# Altium PCB PCB1.PcbDoc
Units mil, origin at the board's own origin, x right, y up, seen from the top; angles counter-clockwise.
Board outline 1181.1 x 2952.76 mil, 2 copper layers (Top Layer, Bottom Layer); 71 components, 40 nets, 303 pads, 0 vias.
Unrouted connection lines stored in the file: 171.
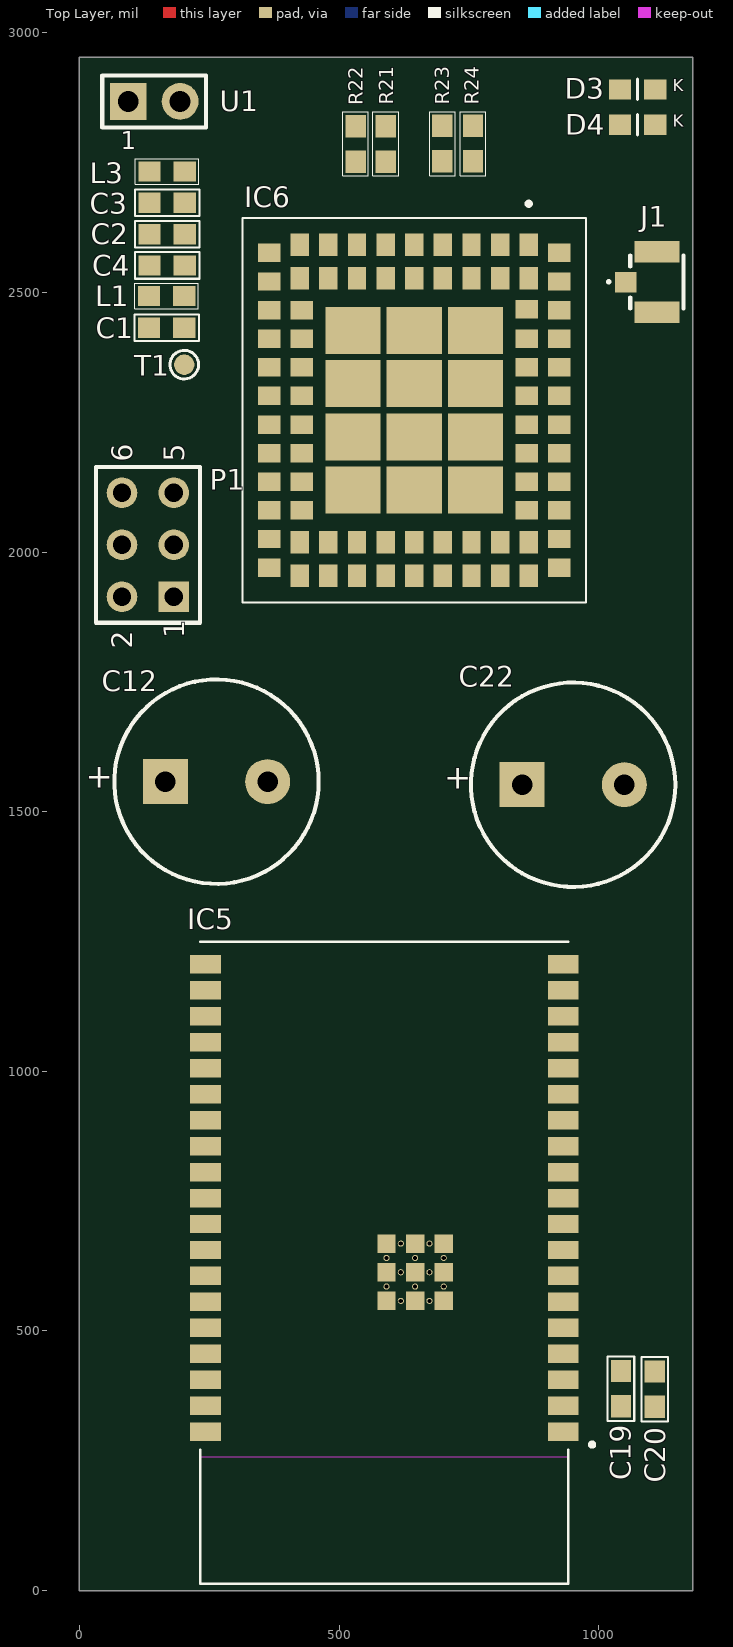
[diagram p0: Top Layer view]
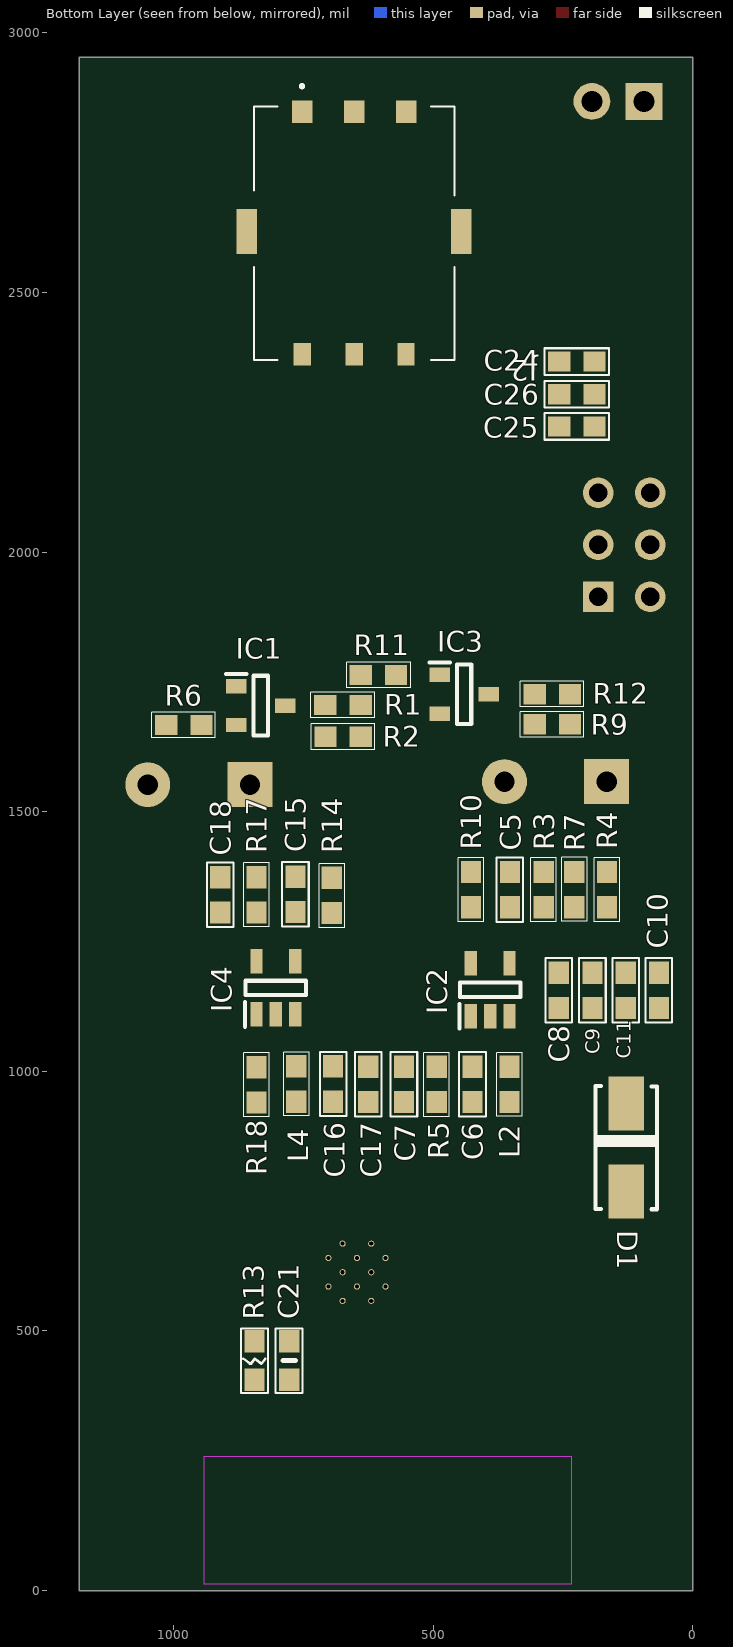
[diagram p1: Bottom Layer view, seen from below]

## Layer stack, top to bottom
Top Solder: solder mask 0.4, Solder Resist, Dk 3.5
Top Layer: signal copper 1.4
Dielectric 1: dielectric 12.6, FR-4, Dk 4.8
Bottom Layer: signal copper 1.4
Bottom Solder: solder mask 0.4, Solder Resist, Dk 3.5

## Board outline
0,0 0,2952.76 1181.1,2952.76 1181.1,0

## Design rules (kind name [scope] priority, off if disabled: settings)
Clearance [All] p1: gap=10 ignorepadtopadclearanceinfootprint=FALSE except(0: Arc-Hole Track-Hole SMDPad-Hole THPad-Hole Via-Hole Fill-Hole Poly-Hole Region-Hole Text-Hole)
PolygonConnect [All] p1: connectstyle=Relief reliefconductorwidth=10 reliefentries=4 polygonreliefangle="90 Angle" airgapwidth=10
RoutingVias [All] p1: holewidth=28 width=50 viastyle="Through Hole" minholewidth=28 minwidth=50 maxholewidth=28 maxwidth=50
SolderMaskExpansion [All] p1: expansion=4
Width [All] p1: maxlimit=10 minlimit=10 preferedwidth=10
30 further rules are at their usual default settings.

## Components (designator, comment, footprint, x,y, rotation, side; value= is the part's Value field where it differs from the comment)
C1 "0.1µF" C0603 168,2432 r0 top
C2 "22uF" C0603 169,2612 r0 top
C3 "22uF" C0603 169,2673 r0 top
C4 "22uF" C0603 169,2552 r0 top
C5 "22uF" C0603 352,1350.03 r90 bottom
C6 "22uF" C0603 424,975 r90 bottom
C7 "22uF" C0603 556,975.03 r90 bottom
C8 "22uF" C0603 258,1156.03 r90 bottom
C9 "1uF" C0603 193,1156.03 r90 bottom
C10 "33pF" C0603 65,1156.03 r90 bottom
C11 "10pF" C0603 129,1156.03 r90 bottom
C12 "470uF" "C16, C49, C58" 264,1558 r0 top
C13 "47pF" C0603 5000.01,2204.73 r90 top
C14 "1nF" "0603 Capacitor" 4090.56,-7.87 r90 top
C15 "22uF" C0603 765,1340.97 r90 bottom
C16 "22uF" C0603 692.52,975.71 r90 bottom
C17 "22uF" C0603 625,975 r90 bottom
C18 "47pF" C0603 910,1340 r270 bottom
C19 "100nF" C0603 1043,389.03 r90 top
C20 "10uF" C0603 1108,388.03 r90 top
C21 "0.1µF" "0603 Capacitor" 777,443 r270 bottom
C22 "470uF" "C16, C49, C58" 951,1552 r0 top
C23 "1nF" "0603 Capacitor" 4669.29,1322.84 r90 top
C24 "33pF" C0603 223,2367 r0 bottom
C25 "33pF" C0603 223,2242 r0 bottom
C26 "33pF" C0603 223,2304 r0 bottom
D1 "M7" D1 128,853.35 r90 bottom
D2 "LED_GREEN" "D2              L0603" 1761,2442 r180 top
D3 "LED_GREEN" "D2              L0603" 1075,2891 r0 top
D4 "LED_GREEN" "D2              L0603" 1075,2823 r0 top
IC1 "MMBT3904" SOT95P240X120-3N 831.63,1704.4 r180 bottom
IC2 "SY8089A" SOT95P285X140-5N 390,1157 r90 bottom
IC3 "MMBT3904" SOT95P240X120-3N 440.14,1726.4 r180 bottom
IC4 "SY8089A" SOT95P285X140-5N 802.76,1160.75 r90 bottom
IC5 "ESP32-WROVER-B" MODULE_ESP32-WROVER-B 587.49,631.2 r180 top
IC6 "SIM800L" SIM800L 644.89,2288.93 r270 top
J1 "CONUFL001-SMD-T" CONUFL001-SMD 1112,2520 r270 top
J2 "MUP-C782-2" MUPC7822 652,2613.75 r0 bottom
L1 "1uH" "L3, L4, L5, L6, L7" 168,2493 r0 top
L2 "2.2uH" "L3, L4, L5, L6, L7" 353,975 r90 bottom
L3 "1uH" "L3, L4, L5, L6, L7" 169,2733 r0 top
L4 "2.2uH" "L3, L4, L5, L6, L7" 763.39,975.71 r90 bottom
P1 "Header 3X2" HDR2X3 182,1914 r90 top
R1 "10K" R0603 673.39,1705.4 r180 bottom
R2 "4.7K" R0603 672.99,1644.4 r180 bottom
R3 "100K/DNP" R0603 287,1350 r90 bottom
R4 "0R" R0603 165,1350 r90 bottom
R5 "560K" R0603 493,975 r90 bottom
R6 "0R/DNP" R0603 979.99,1667 r180 bottom
R7 "100K/DNP" R0603 228,1350 r270 bottom
R8 "1K" R0603 1762,2506 r0 top
R9 "10K" R0603 270.39,1668.4 r180 bottom
R10 "100K" R0603 427,1350 r90 bottom
R11 "4.7K" R0603 605.39,1763.4 r0 bottom
R12 "0R/DNP" R0603 270.39,1726.4 r180 bottom
R13 "470E" R_0603_W 844,443 r270 bottom
R14 "100K" R0603 695,1339 r90 bottom
R15 "10K" R_0603_W 3657.49,-7.87 r90 top
R16 "10K" R_0603_W 1397,620 r90 top
R17 "453K" R0603 840,1340 r270 bottom
R18 "100K" R0603 840,974 r270 bottom
R19 "470E" R_0603_W 5338.59,1322.84 r90 top
R20 "100K" R0603 5102.37,1322.84 r90 top
R21 "0R" R0603 590,2786 r270 top
R22 "0R" R0603 532,2786 r270 top
R23 "470R" R0603 699,2787 r90 top
R24 "470R" R0603 758,2787 r90 top
S1 "SW-PB/DNP" SW_EVP-AWCD4A 4930,945 r90 top
S2 "SW-PB/DNP" SW_EVP-AWCD4A 4802,952 r90 top
T1 "TEST POINT" TP 202,2361 r0 top
U1 "RST_CON_BERG_2.54MM" U23 144,2868 r90 top

## Footprints (in the part's own frame and the unit in brackets; to place one, negate y for a bottom-side part, rotate by r counter-clockwise, add the part's x,y. Pads: shape width x height; smd on the part's side, far side on the other; paste and mask are expansions set on the pad)
"0603 Capacitor" [mil]
  rect 43x39 smd: 1(-37,0) 2(37,0)
  silkscreen extent -62,-26 62,26, body extent -31,-16 32,16, height 32
"C16, C49, C58" [mm]
  rect 2.2x2.2 hole 1: 1(-2.5,0)
  round 2.2 hole 1: 2(2.5,0)
  silkscreen extent -5,-5 5,5
C0603 [mil]
  rect 43x39 smd: 1(-34.03,0) 2(34.03,0)
  silkscreen extent -62,-26 62,26, body extent -31,-16 31,16, height 12
CONUFL001-SMD [mm]
  rect 1x1.05 smd: 1(0,-1.525)
  rect 1.05x2.2 smd: 2(-1.475,0) 3(1.475,0)
  silkscreen extent -1.3,-2.38 1.3,1.3, body extent -1.5,-1.5 1.5,1.59, height 1.25
D1 [mm]
  rect 2.65x1.75 smd: 1(2.15,0) 2(-2.15,0)
  silkscreen extent -3.02,-1.5 3,1.5, body extent -2.75,-1.4 2.75,1.4, height 2.6
"D2              L0603" [mil]
  rect 43x39 smd: 1(-34,0) 2(34,0)
  silkscreen extent 0,-20 0,20, body extent -32,-16 31,16, height 24
HDR2X3 [mm] "Connector; Header; 3x2 Position"
  rect 1.5x1.5 hole 0.9: 1(0,0)
  round 1.5 hole 0.9: 2(0,2.54) 3(2.54,0) 4(2.54,2.54) 5(5.08,0) 6(5.08,2.54)
  silkscreen extent -1.27,-1.27 6.35,3.81
"L3, L4, L5, L6, L7" [mil] "R0603"
  rect 43x39 smd: 1(-34,0) 2(34,0)
  silkscreen extent -61,-25 61,25, body extent -33,-16 33,16, height 22
MODULE_ESP32-WROVER-B [mm]
  rect 1.5x0.9 smd: 1(-8.75,8.26) 2(-8.75,6.99) 3(-8.75,5.72) 4(-8.75,4.45) 5(-8.75,3.18) 6(-8.75,1.91) 7(-8.75,0.64) 8(-8.75,-0.63) 9(-8.75,-1.9) 10(-8.75,-3.17) 11(-8.75,-4.44) 12(-8.75,-5.71) 13(-8.75,-6.98) 14(-8.75,-8.25) 15(-8.75,-9.52) 16(-8.75,-10.79) 17(-8.75,-12.06) 18(-8.75,-13.33) 19(-8.75,-14.6) 20(8.75,-14.6) 21(8.75,-13.33) 22(8.75,-12.06) 23(8.75,-10.79) 24(8.75,-9.52) 25(8.75,-8.25) 26(8.75,-6.98) 27(8.75,-5.71) 28(8.75,-4.44) 29(8.75,-3.17) 30(8.75,-1.9) 31(8.75,-0.63) 32(8.75,0.64) 33(8.75,1.91) 34(8.75,3.18) 35(8.75,4.45) 36(8.75,5.72) 37(8.75,6.99) 38(8.75,8.26)
  rect 0.9x0.9 smd: 39(-2.9,0.46) 40(-1.5,0.46) 41(-0.1,0.46) 42(-2.9,1.86) 43(-1.5,1.86) 44(-0.1,1.86) 45(-2.9,-0.94) 46(-1.5,-0.94) 47(-0.1,-0.94)
  round 0.3 hole 0.2: 48(-0.1,1.16) 49(-1.5,1.16) 50(-2.9,1.16) 51(-2.9,-0.24) 52(-1.5,-0.24) 53(-0.1,-0.24) 54(-0.8,1.86) 55(-2.2,1.86) 56(-0.8,0.46) 57(-2.2,0.46) 58(-2.2,-0.94) 59(-0.8,-0.94)
  Keep-Out Layer region: 9,9.48 -9,9.48 -9,15.7 9,15.7
  silkscreen extent -10.26,-15.7 9,15.7
MUPC7822 [mm]
  rect 1x1.1 smd: C1(2.54,-5.95) C2(0,-5.95) C3(-2.54,-5.95)
  rect 0.85x1.1 smd: C5(2.54,5.9) C6(0,5.9) C7(-2.54,5.9)
  rect 1x2.2 smd: MP1(5.25,-0.1) MP2(-5.25,-0.1)
  silkscreen extent -4.9,-7.25 4.9,6.2, body extent -5.65,-6.4 5.65,6.36, height 1.57
R0603 [mil] "R0603"
  rect 43x39 smd: 1(-34,0) 2(34,0)
  silkscreen extent -62,-25 61,25, body extent -33,-16 33,16, height 22
R_0603_W [mil] "Chip Resistor, 2-Leads, Body 1.60x0.80mm, IPC Medium Density"
  rect 43x39 smd: 1(-37,0) 2(37,0)
  silkscreen extent -62,-26 62,26, body extent -30,-15 33,16, height 18
SIM800L [mm]
  rect 1.1x0.9 smd: 1(-7.7,5.6) 2(-7.7,4.2) 3(-7.7,2.8) 4(-7.7,1.4) 5(-7.7,0) 6(-7.7,-1.4) 7(-7.7,-2.8) 8(-7.7,-4.2) 9(-7.7,-5.6) 22(8.5,-5.6) 23(8.5,-4.2) 24(8.5,-2.8) 25(8.5,-1.4) 26(8.5,0) 27(8.5,1.4) 28(8.5,2.8) 29(8.5,4.2) 30(8.5,5.6) 43(-6.05,5.6) 44(-6.05,4.2) 45(-6.05,2.8) 46(-6.05,1.4) 47(-6.05,0) 48(-6.05,-1.4) 49(-6.05,-2.8) 50(-6.05,-4.2) 51(-6.05,-5.6) 60(6.85,-5.6) 61(6.85,-4.2) 62(6.85,-2.8) 63(6.85,-1.4) 64(6.85,0) 65(6.85,1.4) 66(6.85,2.8) 67(6.85,4.2) 68(6.85,5.6)
  rect 0.9x1.1 smd: 10(-7.3,-7.1) 11(-5.9,-7.1) 12(-4.5,-7.1) 13(-3.1,-7.1) 14(-1.7,-7.1) 15(-0.3,-7.1) 16(1.1,-7.1) 17(2.5,-7.1) 18(3.9,-7.1) 19(5.3,-7.1) 20(6.7,-7.1) 21(8.1,-7.1) 31(8.1,7.1) 32(6.7,7.1) 33(5.3,7.1) 34(3.9,7.1) 35(2.5,7.1) 36(1.1,7.1) 37(-0.3,7.1) 38(-1.7,7.1) 39(-3.1,7.1) 40(-4.5,7.1) 41(-5.9,7.1) 42(-7.3,7.1) 52(-4.5,-5.5) 53(-3.1,-5.5) 54(-1.7,-5.5) 55(-0.3,-5.5) 56(1.1,-5.5) 57(2.5,-5.5) 58(3.9,-5.5) 59(5.3,-5.5) 69(5.3,5.5) 70(3.9,5.5) 71(2.5,5.5) 72(1.1,5.5) 73(-0.3,5.5) 74(-1.7,5.5) 75(-3.1,5.5) 76(-4.55,5.5)
  rect 2.3x2.7 smd: 77(-3.5,3) 78(-3.5,0) 79(-3.5,-3) 80(-0.9,-3) 81(1.7,-3) 82(4.3,-3) 83(4.3,0) 84(4.3,3) 85(1.7,3) 86(-0.9,3) 87(-0.9,0) 88(1.7,0)
  silkscreen extent -9.8,-8.4 9.8,8.4, body extent -8.79,-7.9 9.01,7.9, height 2.42
SOT95P240X120-3N [mm]
  rect 1x0.7 smd: 1(-1.2,0.95) 2(-1.2,-0.95) 3(1.2,0)
  silkscreen extent -1.7,-1.46 0.35,1.55, body extent -1.2,-1.46 1.2,1.46, height 1.2
SOT95P285X140-5N [mm]
  rect 1.2x0.6 smd: 1(-1.3,0.95) 2(-1.3,0) 3(-1.3,-0.95) 4(1.3,-0.95) 5(1.3,0.95)
  silkscreen extent -1.9,-1.48 0.35,1.5, body extent -1.42,-1.47 1.43,1.47, height 1.4
SW_EVP-AWCD4A [mm]
  rect 0.55x1.5 smd: 1(-1.625,0) 2(1.625,0)
  Keep-Out Layer region: 0.95,-1 -0.95,-1 -0.95,1 0.95,1
  Keep-Out Layer region: 0.95,-1 -0.95,-1 -0.95,1 0.95,1
  silkscreen extent -2.5,-1 1.1,1
TP [mm]
  round 1 smd paste-1 mask+0.102: 1(0,0)
  silkscreen extent -0.7,-0.7 0.7,0.7
U23 [mm]
  rect 1.8x1.8 hole 1.02: 1(0,1.27)
  round 1.8 hole 1.02: 2(0,-1.27)
  silkscreen extent -1.27,-2.54 1.27,2.54

## Part data
C1 C14 C21 C23: library part CAP_C_0.1µF/16V, "CAP CER SMD 0.1µF/16V", MANUFACTURER="Murata Electronics North America", Manufacturer Part Number=GRM155R61H104KE19D, Operating Temperature="-55°C ~ 85°C", Package / Case="0402 (1005 Metric)", Ratings=-, Supplier Part Number 1=490-11917-1-ND, Temperature Coefficient=X5R, Tolerance=±10%, Voltage - Rated=16V, Applications="General Purpose", Category=Capacitors, ComponentLink1Description=http://www.murata.com/~/media/webrenewal/support/library/catalog/products/capacitor/mlcc/c02e.ashx, ComponentLink1URL=http://www.murata.com/~/media/webrenewal/support/library/catalog/products/capacitor/mlcc/c02e.ashx, Features=-, Height - Seated (Max)=-, Lead Spacing=-, Lead Style=-, Mounting Type="Surface Mount, MLCC", Packaging="Cut Tape (CT)", Part Status=Active, Pricing 1="1=0.1, 10=0.062, 25=0.0456, 50=0.034, 100=0.0278, 250=0.02328, 500=0.01988, 1000=0.01562, 5000=0.01307 (USD)", ROHS="RoHS Compliant", Size / Dimension="0.039\" L x 0.020\" W (1.00mm x 0.50mm)", Stock 1=958509, Supplier 1=Digi-Key, Thickness (Max)="0.022\" (0.55mm)"
  C1 C21: Capacitance=0.1µF
  C14 C23: Capacitance=1nF
C2 C3 C4 C5 C6 C7 C8 C9 C10 C11 C13 C15 C16 C17 C18 C19 C20: library part "CAP NP", "CAP CER 22UF 10V X5R 0603", Part Number=GRM188R61A226ME15D
C12 C22: library part CAP, "CAP ALUM 470UF 20% 50V RADIAL", Part Number=871-B41896E6477M000
C24 C25 C26: library part CAP_C_0.1µF/16V, "CAP CER SMD 0.1µF/16V", Capacitance=0.1µF, MANUFACTURER="Murata Electronics North America", Manufacturer Part Number=GRM155R61H104KE19D, Operating Temperature="-55°C ~ 85°C", Package / Case="0402 (1005 Metric)", Ratings=-, Supplier Part Number 1=490-11917-1-ND, Temperature Coefficient=X5R, Tolerance=±10%, Voltage - Rated=16V, Applications="General Purpose", Category=Capacitors, ComponentLink1Description=http://www.murata.com/~/media/webrenewal/support/library/catalog/products/capacitor/mlcc/c02e.ashx, ComponentLink1URL=http://www.murata.com/~/media/webrenewal/support/library/catalog/products/capacitor/mlcc/c02e.ashx, Features=-, Height - Seated (Max)=-, Lead Spacing=-, Lead Style=-, Mounting Type="Surface Mount, MLCC", Packaging="Cut Tape (CT)", Part Status=Active, Pricing 1="1=0.1, 10=0.062, 25=0.0456, 50=0.034, 100=0.0278, 250=0.02328, 500=0.01988, 1000=0.01562, 5000=0.01307 (USD)", ROHS="RoHS Compliant", Size / Dimension="0.039\" L x 0.020\" W (1.00mm x 0.50mm)", Stock 1=958509, Supplier 1=Digi-Key, Thickness (Max)="0.022\" (0.55mm)"
D1: "Diode", Manufacturer_Name=LGE, Datasheet Link=https://datasheet.lcsc.com/szlcsc/LGE-M7-SMAJ_C330214.pdf, Height=2.45mm, Manufacturer_Part_Number=M7
D2 D3 D4: library part LED, "LED GREEN CLEAR THIN 0603 SMD", Distributor Part Number=160-1443-1-ND, Manufacturer Part Number=160-1443-2-ND, PACKAGE=0603, Part Number=160-1443-2-ND, Type=Diode
IC1 IC3: "Integrated Circuit", Manufacturer_Name=Diotec, Arrow Part Number=MMBT3904, Arrow Price/Stock=https://www.arrow.com/en/products/mmbt3904/diotec-semiconductor-ag?region=europe, Datasheet Link=https://media.digikey.com/pdf/Data%20Sheets/ON%20Semiconductor%20PDFs/2N3904,MMBT3904,PZT3904.pdf, Height=1.2mm, Manufacturer_Part_Number=MMBT3904
IC2 IC4: "Integrated Circuit", Manufacturer_Name=Silergy, Datasheet Link=https://datasheet.lcsc.com/szlcsc/SY8089AAAC_C78988.pdf, Height=1.4mm, Manufacturer_Part_Number=SY8089A
IC5: "Integrated Circuit", Manufacturer_Name="Espressif Systems", Mouser Part Number=356-ESP32-WROVER-B, Datasheet Link=https://www.espressif.com/sites/default/files/documentation/esp32-wrover-b_datasheet_en.pdf, Manufacturer_Part_Number=ESP32-WROVER-B, Mouser Price/Stock=https://www.mouser.co.uk/ProductDetail/Espressif-Systems/ESP32-WROVER-B?qs=w%2Fv1CP2dgqr%2FL2PHL8uSAQ%3D%3D
IC6: "Integrated Circuit", Manufacturer_Name=SIMCOM, Datasheet Link=http://img.filipeflop.com/files/download/Datasheet_SIM800L.pdf, Height=2.55mm, Manufacturer_Part_Number=SIM800L
J1: "Connector", Manufacturer_Name="Linx Technologies", Mouser Part Number=712-CONUFL001-SMD-T, Datasheet Link=https://linxtechnologies.com/wp/product/mhf-rf-connectors/, Manufacturer_Part_Number=CONUFL001-SMD-T, Mouser Price/Stock=https://www.mouser.co.uk/ProductDetail/Linx-Technologies/CONUFL001-SMD-T?qs=EU6FO9ffTwfRdkBeQTdJWQ%3D%3D
J2: "Connector", Manufacturer_Name=MUP, Datasheet Link=http://www.mupconnector.com/product/show/id/816.html, Height=1.47mm, Manufacturer_Part_Number=MUP-C782-2
L1 L2 L3 L4: library part INDUCTOR, "FERRITE BEAD 120 OHM 0603 1LN", Part Number=490-3996-1-ND, Supplier Part Number 1=BLM18SG121TN1D, Supplier 1=Arrow
P1: "Header, 3-Pin, Dual row", LatestRevisionDate=17-Jul-2002, LatestRevisionNote="Re-released for DXP Platform.", Publisher="Altium Limited"
R1 R2 R3 R5 R6 R7 R9 R10 R11 R12 R14 R17 R18 R20: library part R, "RES SMD 4.7K OHM 1% 1/16W 0603", Distributor Part Number=1276-3466-2-ND, MANUFACTURER=Samsung, PACKAGE=0603, Part Number=P4.7KDBCT-ND, Rating=1/16W, Tolerance=1%, Distributor=Digikey, Manufacturer Part Number=1276-3466-2-ND, Type=Resistor
R4 R13 R16 R19 R21 R22: library part R, "RES SMD 470 OHM 1% 1/10W 0603", PACKAGE=0603, Part Number=311-470HRCT-ND, Type=Resistor
R8 R23 R24: library part R, "RES SMD 1K OHM 5% 1/10W 0603", PACKAGE=0603, Part Number=311-1.0KGRTR-ND, Type=Resistor
R15: library part R, "RES SMD 4.7K OHM 1% 1/16W 0603", PACKAGE=0603, Part Number=311-10KGRTR-ND, Type=Resistor
S1 S2: library part SW-PB, "Switch", LatestRevisionDate=17-Jul-2002, LatestRevisionNote="Re-released for DXP Platform.", PackageDescription="Switch; 2 Leads", PackageReference=SPST-2, Published=24-Mar-1999, Publisher="Altium Limited"
T1: library part Test_P
U1: library part CON_AC_1, "CONN HEADER VERT 2POS 2.54MM", Part Number=609-4434-ND, Supplier Part Number 1=62K8865, Supplier 1=Newark

## Nets (pads, with @x,y where several pads share a name; then routed paths per layer and width w, separated by ;. In a path a pad name is that pad's centre, name@x,y a point inside that pad or via, vN(x,y) a via of type N, cw(c..) or ccw(c..) an arc to the next point about the centre after c; other vN are vias at no path point)
3V3: C16.1 C17.1 C18.1 C19.1 C20.1 C22.1 IC5.2 L4.1 R9.2 R15.1 R16.1 R17.1
4V4: C6.1 C7.1 C8.1 C9.1 C10.1 C11.1 C12.1 C13.1 D1.1 IC6.1 IC6.42 L2.1 R5.1
5VCC: C1.2 C5.1 C15.1 IC2.4 IC4.4 L1.2 P1.6 R3.1 R14.1 T1.1
EN: C21.2 IC5.3 R13.2 R15.2
EN_F: C14.2 P1.2 R13.1 S1.1
GND_POWER: C1.1 C2.2 C3.2 C4.2 C5.2 C6.2 C7.2 C8.2 C9.2 C10.2 C11.2 C12.2 C14.1 C15.2 C16.2 C17.2 C19.2 C20.2 C21.1 C22.2 C23.1 C24.1 C25.1 C26.1 D1.2 D2.2 D3.2 D4.2 IC2.2 IC4.2 IC5.1 IC5.15 IC5.38 IC5.39 IC6.2 IC6.6 IC6.8 IC6.35 IC6.37 IC6.38 IC6.39 IC6.41 IC6.43 IC6.44 IC6.45 IC6.58 IC6.67 IC6.71 IC6.72 IC6.73 IC6.76 IC6.77 IC6.78 IC6.79 IC6.80 IC6.81 IC6.82 IC6.83 IC6.84 IC6.85 IC6.86 IC6.87 IC6.88 J1.2 J1.3 J2.C5 J2.MP1 J2.MP2 L3.2 P1.5 R7.2 R10.2 R18.2 R20.2 S1.2 S2.2
GND_POWER_L: L3.1 U1.1
GSM_ANT: IC6.40 J1.1
GSM_RXD: IC1.3 IC6.31 R1.1 R6.1
GSM_TXD: IC3.2 IC6.32 R12.2
IO0: IC5.25 R16.2 R19.2
IO4: IC5.26 R21.1
IO5: IC5.29 R22.1
IO23: IC5.37 R4.1
IO_26: IC3.3 IC5.11 R9.1 R12.1
IO_27: IC1.2 IC5.12 R6.2
IO_F: C23.2 P1.4 R19.1 S2.1
NetC2_1: C2.1 C3.1 C4.1 L1.1 U1.2
NetC13_2: C13.2 IC2.5 R5.2 R10.1
NetC18_2: C18.2 IC4.5 R17.2 R20.1
NetD2_1: D2.1 R8.2
NetD3_1: D3.1 R23.2
NetD4_1: D4.1 R24.2
NetIC1_1: IC1.1 R2.1
NetIC2_1: IC2.1 R3.2 R4.2 R7.1
NetIC2_3: IC2.3 L2.2
NetIC3_1: IC3.1 R11.1
NetIC4_1: IC4.1 R14.2 R18.1
NetIC4_3: IC4.3 L4.2
NetIC6_48: IC6.48 R21.2
NetIC6_49: IC6.49 R22.2
NETLIGHT_LED: IC6.64 R24.1
RXD: IC5.34 P1.3
SIM_CLK: C25.2 IC6.55 J2.C3
SIM_IO: C24.2 IC6.14 J2.C7
SIM_RST: C26.2 IC6.15 J2.C2
SIM_VCC: IC6.16 J2.C1
STATUS_LED: IC6.4 R23.1
TXD: IC5.35 P1.1
VEXT: IC6.18 R1.2 R2.2 R11.2
pads on no net: IC5.4 IC5.5 IC5.6 IC5.7 IC5.8 IC5.9 IC5.10 IC5.13 IC5.14 IC5.16 IC5.17 IC5.18 IC5.19 IC5.20 IC5.21 IC5.22 IC5.23 IC5.24 IC5.27 IC5.28 IC5.30 IC5.31 IC5.32 IC5.33 IC5.36 IC5.40 IC5.41 IC5.42 IC5.43 IC5.44 IC5.45 IC5.46 IC5.47 IC5.48 IC5.49 IC5.50 IC5.51 IC5.52 IC5.53 IC5.54 IC5.55 IC5.56 IC5.57 IC5.58 IC5.59 IC6.3 IC6.5 IC6.7 IC6.9 IC6.10 IC6.11 IC6.12 IC6.13 IC6.17 IC6.19 IC6.20 IC6.21 IC6.22 IC6.23 IC6.24 IC6.25 IC6.26 IC6.27 IC6.28 IC6.29 IC6.30 IC6.33 IC6.34 IC6.36 IC6.46 IC6.47 IC6.50 IC6.51 IC6.52 IC6.53 IC6.54 IC6.56 IC6.57 IC6.59 IC6.60 IC6.61 IC6.62 IC6.63 IC6.65 IC6.66 IC6.68 IC6.69 IC6.70 IC6.74 IC6.75 J2.C6 R8.1

## Text inside footprints (layer, text, board x,y; h text height)
C12: Top Overlay "+" at 12.03,1530.44 h78.74
C22: Top Overlay "+" at 702.97,1528.38 h78.74
D2: Top Overlay "K" at 1692.89,2453.14 h39.37 r180
D3: Top Overlay "K" at 1143.11,2879.86 h39.37
D4: Top Overlay "K" at 1143.11,2811.86 h39.37
P1: Top Overlay "6" at 102,2174 h39.37 r90; Top Overlay "5" at 202,2174 h39.37 r90; Top Overlay "2" at 102,1814 h39.37 r90; Top Overlay "1" at 202,1834 h39.37 r90
U1: Top Overlay "1" at 80.02,2764.65 h59.06